# Altium PCB USBtoRS232.PcbDoc
Units mm, origin at the board's own origin, x right, y up, seen from the top; angles counter-clockwise.
Board outline 30 x 23 mm, 2 copper layers (Top Layer, Bottom Layer), stack 1.571 mm thick; 21 components, 24 nets, 110 pads, 107 vias.
Unrouted connection lines stored in the file: 11.
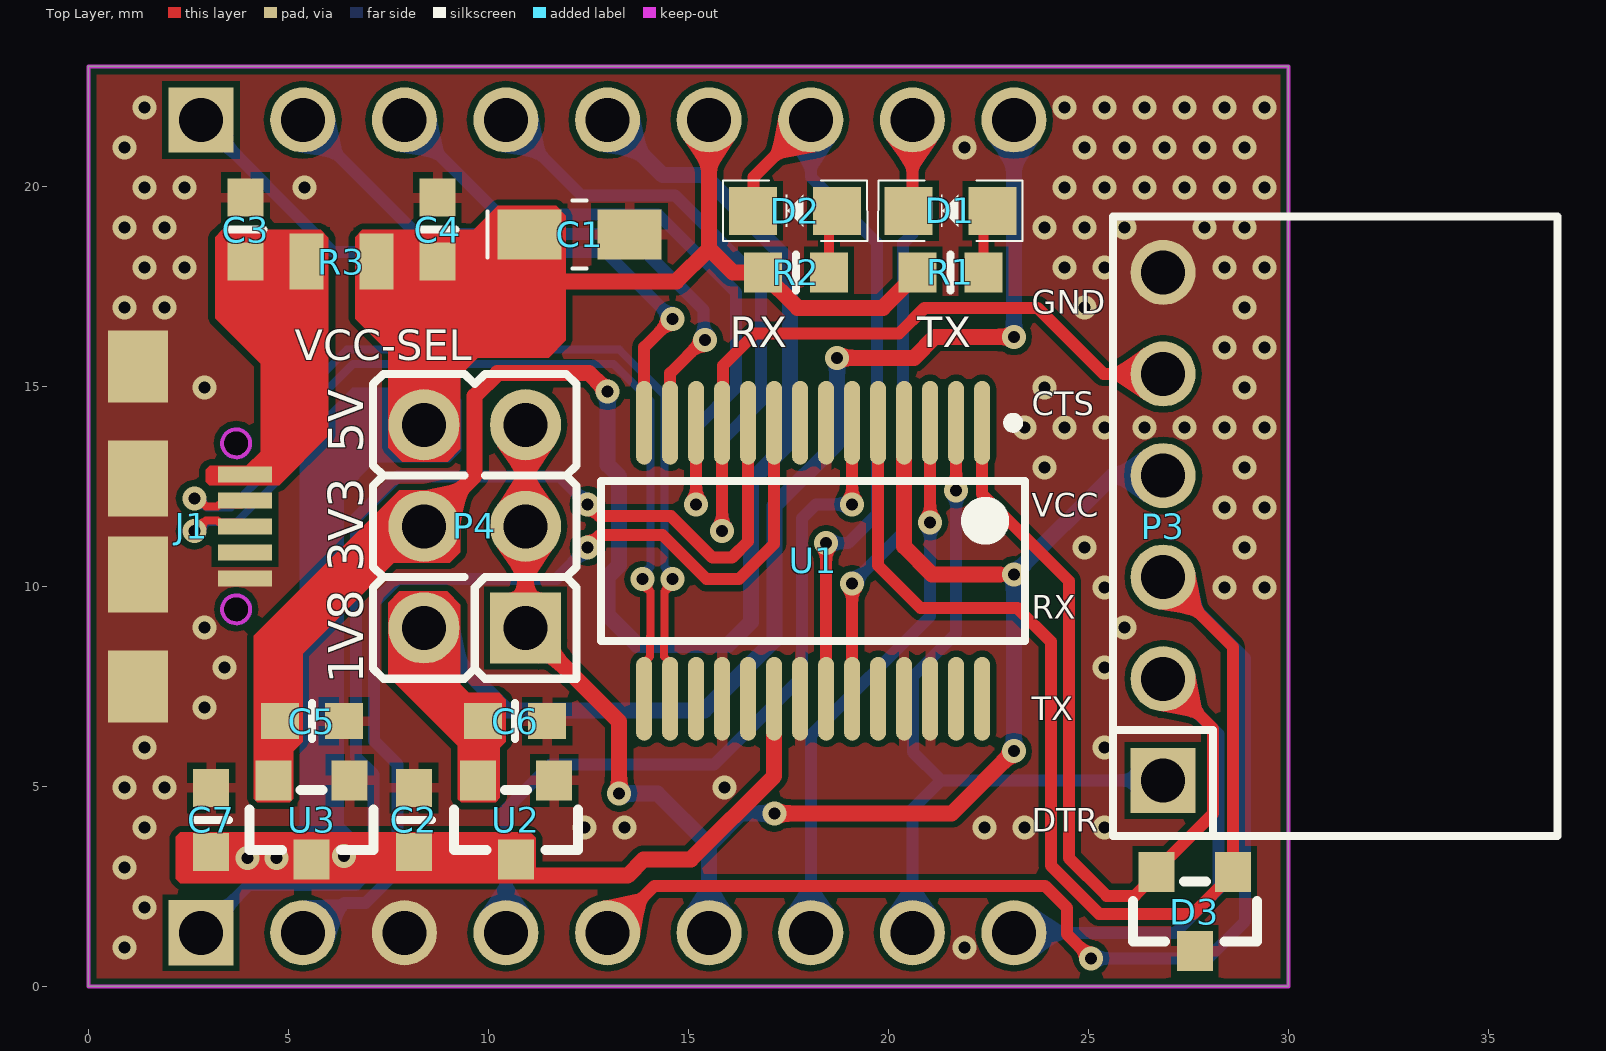
[diagram p0: Top Layer view]
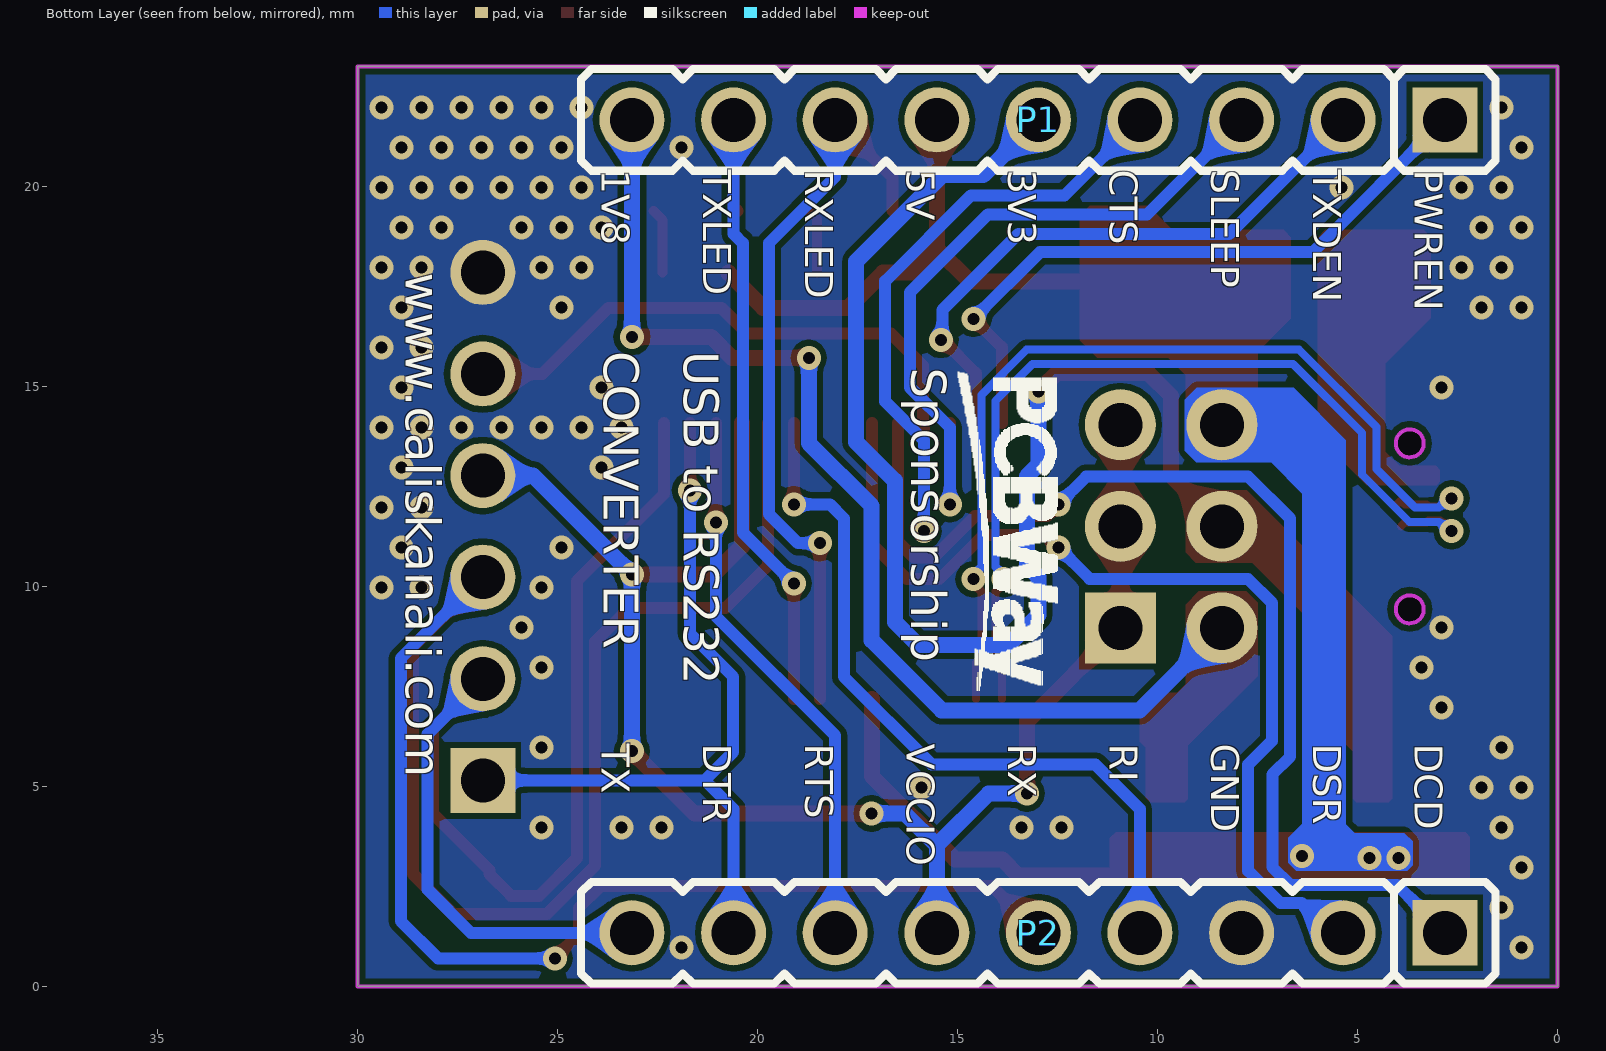
[diagram p1: Bottom Layer view, seen from below]
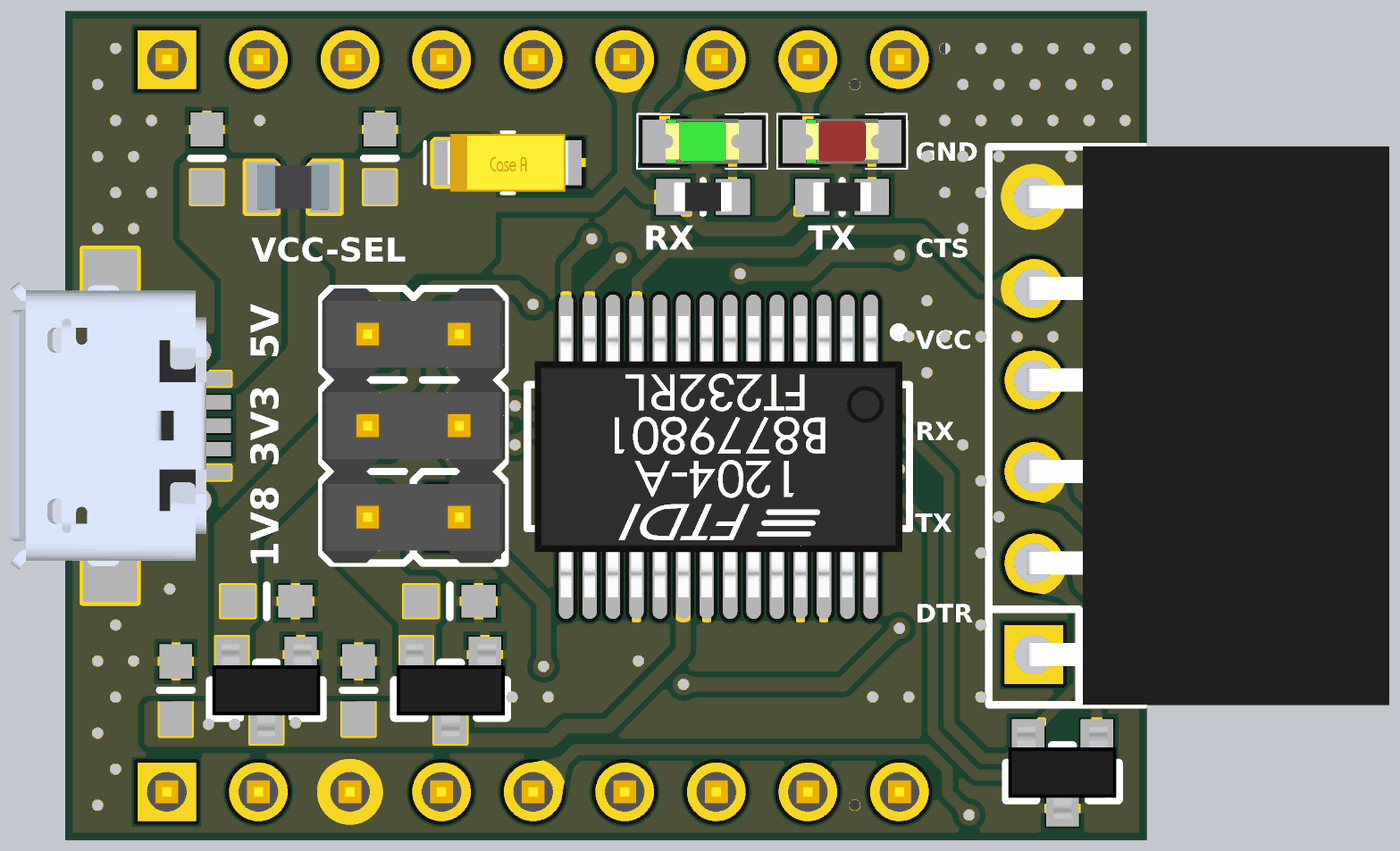
[diagram p2: 3D render of the assembled board from above, using the file's embedded part models]

## Layer stack, top to bottom
Top Solder: solder mask 0.0102, Solder Resist, Dk 3.5
Top Layer: signal copper 0.0356
Dielectric1: core 1.5, Core-009, Dk 4.5
Bottom Layer: signal copper 0.0356
Bottom Solder: solder mask 0.0102, Solder Resist, Dk 3.5

## Board outline
0,0 30,0 30,23 0,23
cut-out: 3.695,13.225 cw(c3.695,13.575) 3.345,13.575 cw(c3.695,13.575) 3.695,13.925 cw(c3.695,13.575) 4.045,13.575 cw(c3.695,13.575)
cut-out: 3.345,9.425 ccw(c3.695,9.425) 3.695,9.075 ccw(c3.695,9.425) 4.045,9.425 ccw(c3.695,9.425) 3.695,9.775 ccw(c3.695,9.425)

## Design rules (kind name [scope] priority, off if disabled: settings)
Clearance [All] p1: gap=0.154 ignorepadtopadclearanceinfootprint=FALSE
DiffPairsRouting [All] p1: maxlimit=0.154 minlimit=0.154 mostfreqgap=0.154 toplayer_minwidth=0.2 toplayer_maxwidth=0.2 toplayer_prefwidth=0.2 bottomlayer_minwidth=0.2 bottomlayer_maxwidth=0.2 bottomlayer_prefwidth=0.2 maxuncoupledlength=12.7
PolygonConnect PolygonConnect_J1 [All vs InComponent('J1')] p1: connectstyle=Direct reliefconductorwidth=0.254 reliefentries=4 polygonreliefangle="90 Angle" airgapwidth=0.254
PolygonConnect [All] p2: thpad.connectstyle=Direct thpad.reliefconductorwidth=0.254 thpad.reliefentries=4 thpad.polygonreliefangle="90 Angle" thpad.airgapwidth=0.254 smdpad.connectstyle=Relief smdpad.reliefconductorwidth=0.25 smdpad.reliefentries=4 smdpad.polygonreliefangle="90 Angle" smdpad.airgapwidth=0.152 via.connectstyle=Direct via.reliefconductorwidth=0.254 via.reliefentries=4 via.polygonreliefangle="90 Angle" via.airgapwidth=0.254
RoutingVias RoutingVias_1 [All] p1: holewidth=0.3 width=0.6 viastyle="Through Hole" minholewidth=0.3 minwidth=0.6 maxholewidth=0.3 maxwidth=0.6
SilkToSolderMaskClearance SilkscreenOverComponentPads [IsPad] p1: minsilkscreentomaskgap=0.254 clearancetoexposedcopper=TRUE
SolderMaskExpansion [All] p1: expansion=0.102
Width [All] p1 off: maxlimit=0.4 minlimit=0.4 preferedwidth=0.4
28 further rules are at their usual default settings.

## Classes and differential pairs
differential pair USB: +USB_P -USB_N

## Components (designator, comment, footprint, x,y, rotation, side; value= is the part's Value field where it differs from the comment)
C1 "47uF/16V" TANT_C1206(3216) 12.28,18.8 r0 top
C2 "1uF" CAPC1608X09N 8.14,4.16 r90 top
C3 "100nF" CAPC1608X09N 3.93,18.92 r270 top
C4 "100nF" CAPC1608X09N 8.73,18.92 r270 top
C5 "1uF" CAPC1608X09N 5.59,6.63 r0 top
C6 "1uF" CAPC1608X09N 10.67,6.63 r0 top
C7 "1uF" CAPC1608X09N 3.07,4.16 r90 top
D1 "LED_RED" L0805_RED 21.55,19.39 r0 top
D2 "LED_GREEN" L0805_GRE 17.67,19.39 r0 top
D3 "PESD12VL2BT" SOT23-A 27.66,1.87 r180 top
J1 "USB" MICRO_USB 2.58,11.5 r270 top locked
P1 "Header 9" "Pin Header S/M 09x1 TH Pitch 2.54mm" 2.82,21.66 r270 bottom
P2 "Header 9" "Pin Header S/M 09x1 TH Pitch 2.54mm" 2.82,1.34 r270 bottom
P3 "RS232" "Pin Header RA/F 06x1 TH Pitch 2.54mm" 26.87,5.15 r0 top locked
P4 "VCC_SELECT" "Pin Header S/M 03x2 TH Pitch 2.54mm" 10.93,8.96 r90 top
R1 "," RES1608X06N 21.55,17.85 r180 top
R2 "," RES1608X06N 17.69,17.85 r180 top
R3 "BLM21PG221SN1D" F0805(2012) 6.325,18.12 r0 top
U1 "IC_FT232RL" SSOP-28 18.12,10.64 r270 top
U2 "MCP1700T-1802E" SOT23-A 10.69,4.16 r180 top
U3 "MCP1700T-1802E" SOT23-A 5.58,4.16 r180 top

## Footprints (in the part's own frame and the unit in brackets; to place one, negate y for a bottom-side part, rotate by r counter-clockwise, add the part's x,y. Pads: shape width x height; smd on the part's side, far side on the other; paste and mask are expansions set on the pad)
CAPC1608X09N [mm] "Chip Capacitor, 2-Leads, Body 1.60x0.80mm, IPC Medium Density"
  round 0.6 on Mech6: 0(0,0)
  rect 0.95x0.9 smd mask+0.05: 1(-0.8,0) 2(0.8,0)
  silkscreen extent 0,-0.45 0,0.45, body extent -0.85,-0.45 0.85,0.45, height 0.9
F0805(2012) [mm] "Chip Capacitor, Body 1.0x0.5mm, Height 0.6mm, IPC Low Density"
  rect 0.85x1.4 smd: 1(-0.875,0) 2(0.875,0)
  body extent -1,-0.62 1,0.63, height 0.85
L0805_GRE [mm]
  rect 1.2x1.2 smd: 1(1.05,0) 2(-1.05,0)
  silkscreen extent -1.8,-0.76 1.8,0.76, body extent -1.01,-0.62 1.01,0.63, height 1.1
L0805_RED [mm]
  rect 1.2x1.2 smd: 1(1.05,0) 2(-1.05,0)
  silkscreen extent -1.8,-0.76 1.8,0.76, body extent -1.01,-0.62 1.01,0.63, height 1.1
MICRO_USB [mm]
  round 0.7 hole 0.7 mask+0: 0(-2.075,1.115) 0(2.075,1.115)
  rect 0.4x1.35 smd mask+0.05: 1(-1.3,1.34) 2(-0.65,1.34) 3(0,1.34) 4(0.65,1.34) 5(1.3,1.34)
  rect 1.8x1.5 smd: 6(-4,-1.335) 6(4,-1.335)
  rect 1.9x1.5 smd: 6(-1.2,-1.335) 6(1.2,-1.335)
  Keep-Out Layer circle w0.1: c2.075,1.115 r0.35
  Keep-Out Layer circle w0.1: c-2.075,1.115 r0.35
  body extent -3.99,-4.09 3.99,1.34, height 2.72
"Pin Header RA/F 06x1 TH Pitch 2.54mm" [mil] "PinHeader 1x1 TH Pitch 2.54mm"
  rect 64x64 hole 43.31: 1(0,0)
  round 64 hole 43.31: 2(0,100) 3(0,200) 4(0,300) 5(0,400) 6(0,500)
  silkscreen extent -49,-55 388,555, body extent -8,-55 388,555, height 112
"Pin Header S/M 03x2 TH Pitch 2.54mm" [mil] "PinHeader 1x1 TH Pitch 2.54mm"
  rect 70x70 hole 43.31: 1(0,0)
  round 70 hole 43.31: 2(0,100) 3(100,0) 4(100,100) 5(200,0) 6(200,100)
  silkscreen extent -50,-50 250,150, body extent -50,-50 250,150, height 374
"Pin Header S/M 09x1 TH Pitch 2.54mm" [mil] "PinHeader 1x1 TH Pitch 2.54mm"
  rect 64x64 hole 43.31: 1(0,0)
  round 64 hole 43.31: 2(0,-100) 3(0,-200) 4(0,-300) 5(0,-400) 6(0,-500) 7(0,-600) 8(0,-700) 9(0,-800)
  silkscreen extent -50,-850 50,50, body extent -50,-850 50,50, height 374
RES1608X06N [mm] "Chip Resistor, 2-Leads, Body 1.60x0.80mm, IPC Medium Density"
  round 0.6 on Mech6: 0(0,0)
  rect 0.95x1 smd mask+0.05: 1(-0.825,0) 2(0.825,0)
  silkscreen extent 0,-0.45 0,0.45, body extent -0.8,-0.4 0.8,0.4, height 0.45
SOT23-A [mm] "SOT-23; 3 Leads; Body 3.0 x 2.5 mm, inc. leads (LxW max), Alternate Lead Configuration"
  rect 0.9x1 smd mask+0.05: 1(-0.953,-0.988) 2(0.954,-0.988) 3(0,0.988)
  silkscreen extent -1.55,-0.75 1.55,0.75, body extent -1.5,-1.27 1.5,1.27, height 1.1
SSOP-28 [mm] "28-Pin SSOP 0.65 mm Pitch"
  oval 2.1x0.4 smd: 1(-3.45,4.225) 2(-3.45,3.575) 3(-3.45,2.925) 4(-3.45,2.275) 5(-3.45,1.625) 6(-3.45,0.975) 7(-3.45,0.325) 8(-3.45,-0.325) 9(-3.45,-0.975) 10(-3.45,-1.625) 11(-3.45,-2.275) 12(-3.45,-2.925) 13(-3.45,-3.575) 14(-3.45,-4.225) 15(3.45,-4.225) 16(3.45,-3.575) 17(3.45,-2.925) 18(3.45,-2.275) 19(3.45,-1.625) 20(3.45,-0.975) 21(3.45,-0.325) 22(3.45,0.325) 23(3.45,0.975) 24(3.45,1.625) 25(3.45,2.275) 26(3.45,2.925) 27(3.45,3.575) 28(3.45,4.225)
  silkscreen extent -3.57,-5.3 2,5.3, body extent -3.91,-5.1 3.91,5.1, height 2
TANT_C1206(3216) [mm]
  rect 1.6x1.25 smd: 1(-1.25,0) 2(1.25,0)
  silkscreen extent -2.3,-0.85 0.18,0.85, body extent -1.7,-0.8 1.7,0.8, height 1.65

## Part data
C1: library part "Cap Pol1", "Tantalum Capacitor"
C2 C5 C6 C7: library part "Cap Pol3", "Polarized Capacitor (Surface Mount)"
C3 C4: library part Cap, "Capacitor"
D1 D2: library part LED0, "Typical INFRARED GaAs LED", LatestRevisionDate=08-Jul-2005, LatestRevisionNote="Mech Layer 1 removed.", PackageDescription="LED; 2 Leads", PackageReference=LED-0, Published=8-Jun-2000, Publisher="Altium Limited"
D3: "DIODE TVS-2CH-BI-DIRECT PESD12VL2BT 15A 12V  SMD SOT23", ComponentLink1URL="\\vikoonline\TPM-ARGE\AR-GE\DATA SHEET\", KILIF=SOT23, Max AKIM=15A, MONTAJ=SMD, SINIF=DIODE, STOK KODU=266187, TERS DAYANIM GERYLYMY=12V, TIPI=TVS-2CH-BI-DIRECT
J1: library part MINI_USB
P1 P2: "Header, 9-Pin", LatestRevisionDate=17-Jul-2002, LatestRevisionNote="Re-released for DXP Platform.", Publisher="Altium Limited"
P3: library part "Header 6H", "Header, 6-Pin, Right Angle", LatestRevisionDate=17-Jul-2002, LatestRevisionNote="Re-released for DXP Platform.", Publisher="Altium Limited"
P4: library part "Header 3X2A", "Header, 3-Pin, Dual row", LatestRevisionDate=17-Jul-2002, LatestRevisionNote="Re-released for DXP Platform.", Publisher="Altium Limited"
R1 R2: library part Res1, "Resistor"
R3: library part Res2, "FERRITE BEAD 220 OHM 0805 1LN"
U1: "FT232R USB UART"
U2 U3: library part LM337H, "Three-Terminal Adjustable Negative Voltage Regulator", ComponentLink1Description="Manufacturer Link", ComponentLink1URL=http://www.st.com/, ComponentLink2Description=Datasheet, ComponentLink2URL=http://www.st.com/stonline/products/literature/ds/2167/lm137.pdf, DatasheetDocument=Mar-1993, LatestRevisionDate=17-Jul-2002, LatestRevisionNote="Re-released for DXP Platform.", PackageReference=TO-39, Published=24-Aug-2001, Publisher="Altium Limited"

## Via types
v1: diameter 0.6, hole 0.3, Top Layer to Bottom Layer, tented both sides, 107 vias

## Nets (pads, with @x,y where several pads share a name; then routed paths per layer and width w, separated by ;. In a path a pad name is that pad's centre, name@x,y a point inside that pad or via, vN(x,y) a via of type N, cw(c..) or ccw(c..) an arc to the next point about the centre after c; other vN are vias at no path point)
1V8: C6.1 P1.9 P4.2 U2.2 | length 28.1
  Top Layer w0.4: v1(18.72,15.715) 20.642,15.715 21.163,16.236 v1(23.14,16.236)
  Bottom Layer w0.4: P4.2 10.45,6.9 15.4,6.9 17.15,8.65 17.15,12.01 18.72,13.58 v1(18.72,15.715) ; v1(23.14,16.236) P1.9
3V3: C5.1 P1.5 P4.4 U3.2 | length 32.9
  Top Layer w0.4: P4.4 9.658,12.768 9.658,14.758 10.231,15.331 12.519,15.331 v1(12.98,14.87)
  Bottom Layer w0.4: P1.5 14.36,20.28 15.38,20.28 17.54,18.12 17.54,13.615 16.57,12.645 16.57,9.115 15.995,8.54 13.72,8.54 12.98,9.28 12.98,10.235 13.27,10.525 13.27,12.748 12.98,13.038 v1(12.98,14.87)
5V: C1.1 C2.1 C4.2 C7.1 P1.6 P4.6 R1.2 R2.2 R3.2 U1.20 U2.3 U3.3 | length 23.4
  Top Layer w0.4: U2.3 11.092,2.77 13.48,2.77 13.882,3.172 15.062,3.172 17.145,5.255 U1.20 ; 11.47,17.71 11.555,17.625 14.7,17.625 15.52,18.445 ; P1.6 15.52,18.445 ; R1.2 20.725,17.825 19.86,16.96 17.73,16.96 16.865,17.825 R2.2 16.115,17.85 15.52,18.445
  other v1: 3.974,3.215 4.699,3.215 6.391,3.253
C\T\S\: P1.4 P3.5 U1.11 | length 31.1
  Top Layer w0.3: v1(15.845,11.38) U1.11 15.864,14.109 15.864,15.519 16.664,16.319 20.261,16.319 20.902,16.96 23.731,16.96 25.381,15.31 P3.5
  Bottom Layer w0.3: P1.4 12.324,19.776 14.664,19.776 16.81,17.63 16.81,14.62 15.845,13.655 v1(15.845,11.38)
D\C\D\: P2.1 U1.10 | length 28.1
  Top Layer w0.3: v1(12.48,12.05) 12.77,11.76 14.56,11.76 15.6,10.72 16.09,10.72 16.495,11.125 U1.10
  Bottom Layer w0.3: P2.1 4.016,2.536 6.686,2.536 7.13,2.98 7.13,5.3 6.686,5.744 6.686,11.696 7.733,12.743 11.787,12.743 v1(12.48,12.05)
D\S\R\: P2.2 U1.9 | length 24.5
  Top Layer w0.3: v1(12.48,10.97) 12.79,11.28 14.358,11.28 15.458,10.18 16.26,10.18 17.145,11.065 U1.9
  Bottom Layer w0.3: P2.2 5.662,1.34 6.404,2.082 6.925,2.082 7.733,2.89 7.733,5.547 7.14,6.14 7.14,9.587 7.743,10.19 11.7,10.19 v1(12.48,10.97)
D\T\R\: P2.8 P3.1 U1.2 | length 19.3
  Top Layer w0.3: v1(21.695,12.4) U1.2
  Bottom Layer w0.3: P2.8 20.6,4.43 21.32,5.15 ; v1(21.695,12.4) 21.695,8.825 20.61,7.74 20.61,5.86 21.32,5.15 ; P3.1 21.32,5.15
GND: C1.2 C2.2 C3.1 C4.1 C5.2 C6.2 C7.2 D3.3 J1.5 J1.6 P2.3 P3.6 U1.7 U1.18 U1.21 U1.25 U1.26 U2.1 U3.1
  other v1: 0.9,0.97 21.9,0.97 1.4,1.97 0.9,2.97 1.4,3.97 12.4,3.97 13.4,3.97 22.4,3.97 23.4,3.97 25.4,3.97 0.9,4.97 1.9,4.97 15.9,4.97 1.4,5.97 25.4,5.97 2.9,6.97 3.4,7.97 25.4,7.97 2.9,8.97 25.9,8.97 25.4,9.97 28.4,9.97 29.4,9.97 24.9,10.97 28.9,10.97 28.4,11.97 29.4,11.97 23.9,12.97 28.9,12.97 23.4,13.97 24.4,13.97 25.4,13.97 26.4,13.97 27.4,13.97 28.4,13.97 29.4,13.97 2.9,14.97 23.9,14.97 28.9,14.97 28.4,15.97 29.4,15.97 0.9,16.97 1.9,16.97 24.9,16.97 28.9,16.97 1.4,17.97 2.4,17.97 24.4,17.97 25.4,17.97 28.4,17.97 29.4,17.97 0.9,18.97 1.9,18.97 23.9,18.97 24.9,18.97 25.9,18.97 27.9,18.97 28.9,18.97 1.4,19.97 2.4,19.97 5.4,19.97 24.4,19.97 25.4,19.97 26.4,19.97 27.4,19.97 28.4,19.97 29.4,19.97 0.9,20.97 21.9,20.97 24.9,20.97 25.9,20.97 26.9,20.97 27.9,20.97 28.9,20.97 1.4,21.97 24.4,21.97 25.4,21.97 26.4,21.97 27.4,21.97 28.4,21.97 29.4,21.97
NC: U1.8
NetC3_2: C3.2 J1.1 R3.1
NetD1_1: D1.1 R1.1 | length 1.6
  Top Layer w0.25: R1.1 22.375,19.165 D1.1
NetD2_1: D2.1 R2.1 | length 1.6
  Top Layer w0.25: R2.1 18.515,19.185 D2.1
PWREN: P1.1 U1.14 | length 16.7
  Top Layer w0.3: U1.14 13.895,15.981 v1(14.604,16.69)
  Bottom Layer w0.3: P1.1 6.124,18.356 12.938,18.356 v1(14.604,16.69)
R\I\: P2.4 U1.6 | length 19.3
  Top Layer w0.3: v1(19.095,12.05) U1.6
  Bottom Layer w0.3: P2.4 10.44,4.43 11.557,5.547 15.647,5.547 17.841,7.741 17.841,11.701 18.19,12.05 v1(19.095,12.05)
R\T\S\: P2.7 U1.3 | length 14
  Top Layer w0.3: v1(21.045,11.6) U1.3
  Bottom Layer w0.3: P2.7 18.06,6.27 21.045,9.255 v1(21.045,11.6)
RXD: D3.1 P2.5 P3.3 U1.5 | length 55.3
  Top Layer w0.3: P2.5 14.15,2.51 23.92,2.51 24.466,1.964 24.466,1.304 v1(25.07,0.7) ; U1.5 19.745,10.518 20.808,9.455 23.225,9.455 24.06,8.62 24.06,3.02 25.27,1.81 27.615,1.81 28.613,2.808 D3.1 28.613,8.487 P3.3
  Bottom Layer w0.3: v1(25.07,0.7) 27.99,0.7 28.92,1.63 28.92,8.2 26.89,10.23 P3.3
RXLED: D2.2 P1.7 U1.22 | length 18.9
  Top Layer w0.3: D2.2@16.63,19.4 16.63,20.23 P1.7 ; U1.22 v1(18.445,11.08)
  Bottom Layer w0.3: P1.7 18.06,20.24 19.72,18.58 19.72,11.81 18.99,11.08 v1(18.445,11.08)
SLEEP: P1.3 U1.12 | length 17.8
  Top Layer w0.3: v1(15.195,12.05) U1.12
  Bottom Layer w0.3: P1.3 10.259,19.301 14.239,19.301 16.19,17.35 16.19,14.97 15.195,13.975 v1(15.195,12.05)
TXD: D3.2 P2.9 P3.2 U1.1 | length 32
  Top Layer w0.3: U1.1 22.345,12.305 24.514,10.136 24.514,3.208 25.458,2.264 26.163,2.264 26.706,2.808 D3.2 26.706,2.908 28.12,4.321 28.12,6.44 P3.2
  Bottom Layer w0.3: P2.9 27.17,1.34 28.25,2.42 28.25,6.31 P3.2
TXDEN: P1.2 U1.13 | length 15.2
  Top Layer w0.3: U1.13 14.545,15.331 v1@15.374,16.16
  Top Layer w0.4: v1@15.374,16.16 v1(15.42,16.16)
  Bottom Layer w0.3: P1.2 8.21,18.81 13.48,18.81 15.382,16.908 v1@15.382,16.198
  Bottom Layer w0.4: v1@15.382,16.198 v1(15.42,16.16)
TXLED: D1.2 P1.8 U1.23 | length 17.4
  Top Layer w0.3: U1.23 v1(19.095,10.072) ; D1.2 20.6,19.49 P1.8
  Bottom Layer w0.3: v1(19.095,10.072) 20.37,11.347 20.37,18.58 20.6,18.81 P1.8
USB_N: J1.2 U1.16 | length 23.9
  Top Layer w0.2: v1(2.649,12.202) 2.74,12.202 2.94,12.002 3.228,12.002 3.276,12.05 3.82,12.05 J1.2 J1.2@4.02,12.05 ; U1.16 14.545,8.094 14.397,8.242 14.397,8.597 14.404,8.604 14.404,9.872 14.604,10.072 v1(14.604,10.18)
  Bottom Layer w0.2: v1(2.649,12.202) 2.732,12.202 2.966,11.968 3.561,11.968 4.53,12.937 4.53,13.981 6.466,15.916 13.274,15.916 14.404,14.787 14.404,10.488 14.604,10.288 v1(14.604,10.18)
USB_P: J1.3 U1.15 | length 23.2
  Top Layer w0.2: v1(2.65,11.38) 2.672,11.38 2.94,11.648 3.228,11.648 3.276,11.6 3.82,11.6 J1.3 ; v1(13.85,10.18) 13.85,10.072 14.05,9.872 14.05,8.751 14.043,8.744 14.043,8.242 13.895,8.094 U1.15
  Bottom Layer w0.2: v1(2.65,11.38) 2.733,11.38 2.967,11.614 3.708,11.614 4.884,12.79 4.884,13.834 6.612,15.562 13.128,15.562 14.05,14.64 14.05,10.488 13.85,10.288 v1(13.85,10.18)
VCCIO: P2.6 P3.4 P4.1 P4.3 P4.5 U1.4 | length 38.7
  Top Layer w0.4: P4.5 P4.3 P4.1 13.27,6.62 v1(13.27,4.821) ; v1(17.15,4.321) 21.581,4.321 v1(23.14,5.88) ; U1.4 20.395,12.287 20.391,12.283 20.391,10.999 21.09,10.3 22.79,10.3
  Bottom Layer w0.4: v1(13.27,4.821) 14.224,4.821 15.52,3.525 ; P2.6 15.52,3.525 ; v1(17.15,4.321) 16.316,4.321 15.52,3.525 ; v1(23.14,5.88) v1(23.14,10.3) 25.61,12.77 P3.4
pads on no net: C2.0 C3.0 C4.0 C5.0 C6.0 C7.0 J1.0 J1.4 R1.0 R2.0 U1.17 U1.19 U1.24 U1.27 U1.28

## Polygon pours and split planes (outlines as drawn)
GND on Top Layer "Top Layer-No Net" (solid, pour order 2): 0,0.03 30,0.03 30,23 0,23
GND on Bottom Layer "Top Layer-No Net" (solid, pour order 4): 0,0.03 30,0.03 30,23 0,23

## Keep-outs
Keep-Out Layer:
  the board outline again, w0.1

## Other copper
Top Layer:
  region net 5V: 11.05,3.85 11.19,3.71 11.19,2.71 11.06,2.58 2.3,2.58 2.19,2.69 2.19,3.74 2.3,3.85
  region net 5V: 7.5,15.86 7.5,13.468 7.848,13.12 8.979,13.12 9.3,13.441 9.3,15.278 9.736,15.715 11.505,15.715 11.94,16.15 11.94,19.27 11.7,19.51 10.23,19.51 9.63,18.91 6.85,18.91 6.67,18.73 6.67,16.69
  region net 1V8: 10.29,5.97 10.44,6.12 10.44,7.17 10.27,7.34 9.51,7.34 9.3,7.55 9.3,9.545 8.973,9.872 7.778,9.872 7.5,9.593 7.5,7.75 9.24,6.01 9.24,4.68 9.32,4.6 10.18,4.6 10.29,4.71
  region net 3V3: 5.12,5.88 5.36,6.12 5.36,8.32 7.63,10.59 9.04,10.59 9.3,10.85 9.3,12.142 9.042,12.4 7.77,12.4 4.13,8.76 4.13,4.69 4.22,4.6 5.03,4.6 5.12,4.69
  region net NetC3_2: 3.95,13.01 4.31,13.37 4.31,15.56 3.17,16.7 3.17,18.732 3.348,18.91 5.81,18.91 6,18.72 6,13.76 4.77,12.53 3.02,12.53 2.94,12.61 2.94,12.92 3.03,13.01
Bottom Layer:
  region net 5V: 7.16,13.1 6.38,12.32 6.38,4.06 6.73,3.71 6.73,3.084 6.536,2.89 3.763,2.89 3.625,3.028 3.625,3.625 3.83,3.83 5.07,3.83 5.29,4.05 5.29,13.65 6.6,14.96 9.02,14.96 9.32,14.66 9.32,13.39 9.03,13.1

## Silkscreen, mask and mechanical layers (free items; w line width, h text height)
Top Overlay:
  text "GND" at 23.58,16.616 h1
  text "RX          TX" at 16.04,15.73 h1.3
  text "VCC-SEL" at 5.16,15.4 h1.3
  text "CTS" at 23.58,14.076 h1
  text "5V" at 7.16,13.34 h1.5 r90
  text "VCC" at 23.58,11.536 h1
  text "3V3" at 7.16,10.36 h1.5 r90
  text "RX" at 23.58,8.996 h1
  text "1V8" at 7.16,7.57 h1.5 r90
  text "TX" at 23.58,6.456 h1
  text "DTR" at 23.58,3.66 h1
Bottom Overlay:
  drawing of 619 lines, arcs and shapes, not listed
  text "PWREN" at 3.81,20.42 h1.2 r90
  text "TXDEN" at 6.35,20.42 h1.2 r90
  text "SLEEP" at 8.89,20.42 h1.2 r90
  text "CTS" at 11.43,20.42 h1.2 r90
  text "3V3" at 13.97,20.42 h1.2 r90
  text "5V" at 16.51,20.42 h1.2 r90
  text "RXLED" at 19.05,20.42 h1.2 r90
  text "TXLED" at 21.59,20.42 h1.2 r90
  text "1V8" at 24.13,20.42 h1.2 r90
  text "www.caliskanali.com" at 29.08,17.84 h1.5 r90
  text "USB to RS232" at 22.13,15.88 h1.5 r90
  text "CONVERTER" at 24.13,15.88 h1.5 r90
  text "Sponsorship" at 16.45,15.46 h1.5 r90
  text "DCD" at 3.81,6.07 h1.2 r90
  text "DSR" at 6.35,6.07 h1.2 r90
  text "GND" at 8.89,6.07 h1.2 r90
  text "RI" at 11.43,6.07 h1.2 r90
  text "RX" at 13.97,6.07 h1.2 r90
  text "VCCIO" at 16.51,6.07 h1.2 r90
  text "RTS" at 19.05,6.07 h1.2 r90
  text "DTR" at 21.59,6.07 h1.2 r90
  text "TX" at 24.13,6.07 h1.2 r90
Drill Drawing:
  circle w0.254: c46.586,20.965 r1.367
  lines w0.025: 132.648,36.319 138.209,41.88 144.209,47.88 150.209,53.88 156.209,59.88 159.209,62.88 ; 132.648,39.319 135.209,41.88 141.209,47.88 147.209,53.88 153.209,59.88 159.209,65.88 ; 132.648,42.319 138.209,47.88 144.209,53.88 150.209,59.88 156.209,65.88 159.209,68.88 ; 132.648,45.319 135.209,47.88 141.209,53.88 147.209,59.88 153.209,65.88 159.209,71.88 ; 132.648,48.319 138.209,53.88 144.209,59.88 150.209,65.88 156.209,71.88 159.209,74.88 ; 132.648,51.319 135.209,53.88 141.209,59.88 147.209,65.88 153.209,71.88 159.209,77.88 ; 132.648,54.319 138.209,59.88 144.209,65.88 150.209,71.88 156.209,77.88 ; 132.648,57.319 135.209,59.88 141.209,65.88 147.209,71.88 153.209,77.88 ; 132.648,60.319 138.209,65.88 144.209,71.88 150.209,77.88 ; 132.648,63.319 135.209,65.88 141.209,71.88 147.209,77.88 ; 132.648,66.319 138.209,71.88 144.209,77.88 ; 132.648,69.319 135.209,71.88 141.209,77.88 ; 132.648,72.319 138.209,77.88 ; 132.648,75.319 135.209,77.88 ; 135.209,35.88 141.209,41.88 147.209,47.88 153.209,53.88 159.209,59.88 ; 138.209,35.88 144.209,41.88 150.209,47.88 156.209,53.88 159.209,56.88 ; 141.209,35.88 147.209,41.88 153.209,47.88 159.209,53.88 ; 144.209,35.88 150.209,41.88 156.209,47.88 159.209,50.88 ; 147.209,35.88 153.209,41.88 159.209,47.88 ; 150.209,35.88 156.209,41.88 159.209,44.88 ; 153.209,35.88 159.209,41.88 ; 156.209,35.88 159.209,38.88
  lines w0.254: 45.219,7.3 47.952,7.3 47.952,10.033 45.219,10.033 45.219,7.3 ; 45.219,16.182 47.952,16.182 46.586,13.449 45.219,16.182
  lines w0.381: 42.817,5.455 222.567,5.455 ; 42.817,23.903 222.567,23.903 ; 43.01,41.88 55.17,41.88 78.974,41.88 99.582,41.88 116.61,41.88 132.648,41.88 159.209,41.88 ; 43.01,47.88 55.17,47.88 78.974,47.88 99.582,47.88 116.61,47.88 132.648,47.88 159.209,47.88 ; 43.01,53.88 55.17,53.88 78.974,53.88 99.582,53.88 116.61,53.88 132.648,53.88 159.209,53.88 ; 43.01,59.88 55.17,59.88 78.974,59.88 99.582,59.88 116.61,59.88 132.648,59.88 159.209,59.88 ; 43.01,65.88 55.17,65.88 78.974,65.88 99.582,65.88 116.61,65.88 132.648,65.88 159.209,65.88 ; 43.01,71.88 55.17,71.88 78.974,71.88 99.582,71.88 116.61,71.88 132.648,71.88 159.209,71.88 ; 43.01,77.88 159.209,77.88 ; 55.17,83.88 55.17,35.88 ; 58.505,-0.694 58.505,30.053 ; 73.294,-0.694 73.294,30.053 ; 78.974,83.88 78.974,35.88 ; 99.582,83.88 99.582,35.88 ; 101.612,-0.694 101.612,30.053 ; 114.092,-0.694 114.092,30.053 ; 116.61,83.88 116.61,35.88 ; 132.092,-0.694 132.092,30.053 ; 132.648,83.88 132.648,35.88 ; 166.592,-0.694 166.592,30.053 ; 181.078,-0.694 181.078,30.053 ; 199.301,-0.694 199.301,30.053 ; 55.17,35.88 78.974,35.88 ; 55.17,35.88 43.01,35.88 43.01,83.88 159.209,83.88 159.209,35.88 132.648,35.88 ; 78.974,35.88 99.582,35.88 ; 99.582,35.88 116.61,35.88 ; 116.61,35.88 132.648,35.88 ; 42.817,-0.694 222.567,-0.694 222.567,30.053 42.817,30.053 42.817,-0.694
  text "Layer" at 46.01,79.38 h3
  text "Name" at 58.17,79.38 h3
  text "Material" at 81.974,79.38 h3
  text "Thickness" at 102.582,79.38 h3
  text "Constant" at 119.61,79.38 h3
  text "Board Layer Stack" at 135.648,79.38 h3
  text "Top Overlay" at 58.17,73.38 h3
  text "Top Solder" at 58.17,67.38 h3
  text "Solder Resist" at 81.974,67.38 h3
  text "0,010mm" at 102.582,67.38 h3
  text "3,5" at 119.61,67.38 h3
  text "1" at 46.01,61.38 h3
  text "Top Layer" at 58.17,61.38 h3
  text "Copper" at 81.974,61.38 h3
  text "0,036mm" at 102.582,61.38 h3
  text "Dielectric1" at 58.17,55.38 h3
  text "Core-009" at 81.974,55.38 h3
  text "1,500mm" at 102.582,55.38 h3
  text "4,5" at 119.61,55.38 h3
  text "2" at 46.01,49.38 h3
  text "Bottom Layer" at 58.17,49.38 h3
  text "Copper" at 81.974,49.38 h3
  text "0,036mm" at 102.582,49.38 h3
  text "Bottom Solder" at 58.17,43.38 h3
  text "Solder Resist" at 81.974,43.38 h3
  text "0,010mm" at 102.582,43.38 h3
  text "3,5" at 119.61,43.38 h3
  text "Bottom Overlay" at 58.17,37.38 h3
  text "Symbol" at 46.506,25.748 h3.6
  text "Count" at 60.35,25.748 h3.6
  text "Hole Size" at 75.139,25.748 h3.6
  text "Plated" at 103.456,25.748 h3.6
  text "Hole Type" at 115.937,25.748 h3.6
  text "Drill Layer Pair" at 133.936,25.748 h3.6
  text "Via/Pad" at 168.436,25.748 h3.6
  text "Pad Shape" at 182.923,25.748 h3.6
  text "Template" at 201.146,25.748 h3.6
  text "2" at 60.35,19.599 h3
  text "0,700mm (27,56mil)" at 75.139,19.599 h3
  text "PTH" at 103.456,19.599 h3
  text "Round" at 115.937,19.599 h3
  text "Top Layer - Bottom Layer" at 133.936,19.599 h3
  text "Pad" at 168.436,19.599 h3
  text "Rounded" at 182.923,19.599 h3
  text "c70h70m0mx0" at 201.146,19.599 h3
  text "30" at 60.35,13.449 h3
  text "1,100mm (43,31mil)" at 75.139,13.449 h3
  text "PTH" at 103.456,13.449 h3
  text "Round" at 115.937,13.449 h3
  text "Top Layer - Bottom Layer" at 133.936,13.449 h3
  text "Pad" at 168.436,13.449 h3
  text "(Mixed)" at 182.923,13.449 h3
  text "(Mixed)" at 201.146,13.449 h3
  text "107" at 60.35,7.3 h3
  text "0,300mm (11,81mil)" at 75.139,7.3 h3
  text "PTH" at 103.456,7.3 h3
  text "Round" at 115.937,7.3 h3
  text "Top Layer - Bottom Layer" at 133.936,7.3 h3
  text "Via" at 168.436,7.3 h3
  text "Rounded" at 182.923,7.3 h3
  text "v60h30m0mx0" at 201.146,7.3 h3
  text "139 Total" at 60.35,1.151 h3

## Dimensions
0,0 to 0,23 on Drill Drawing
0,0 to 30,0 on Drill Drawing